# Allegro board EmonTx02_V21.brd
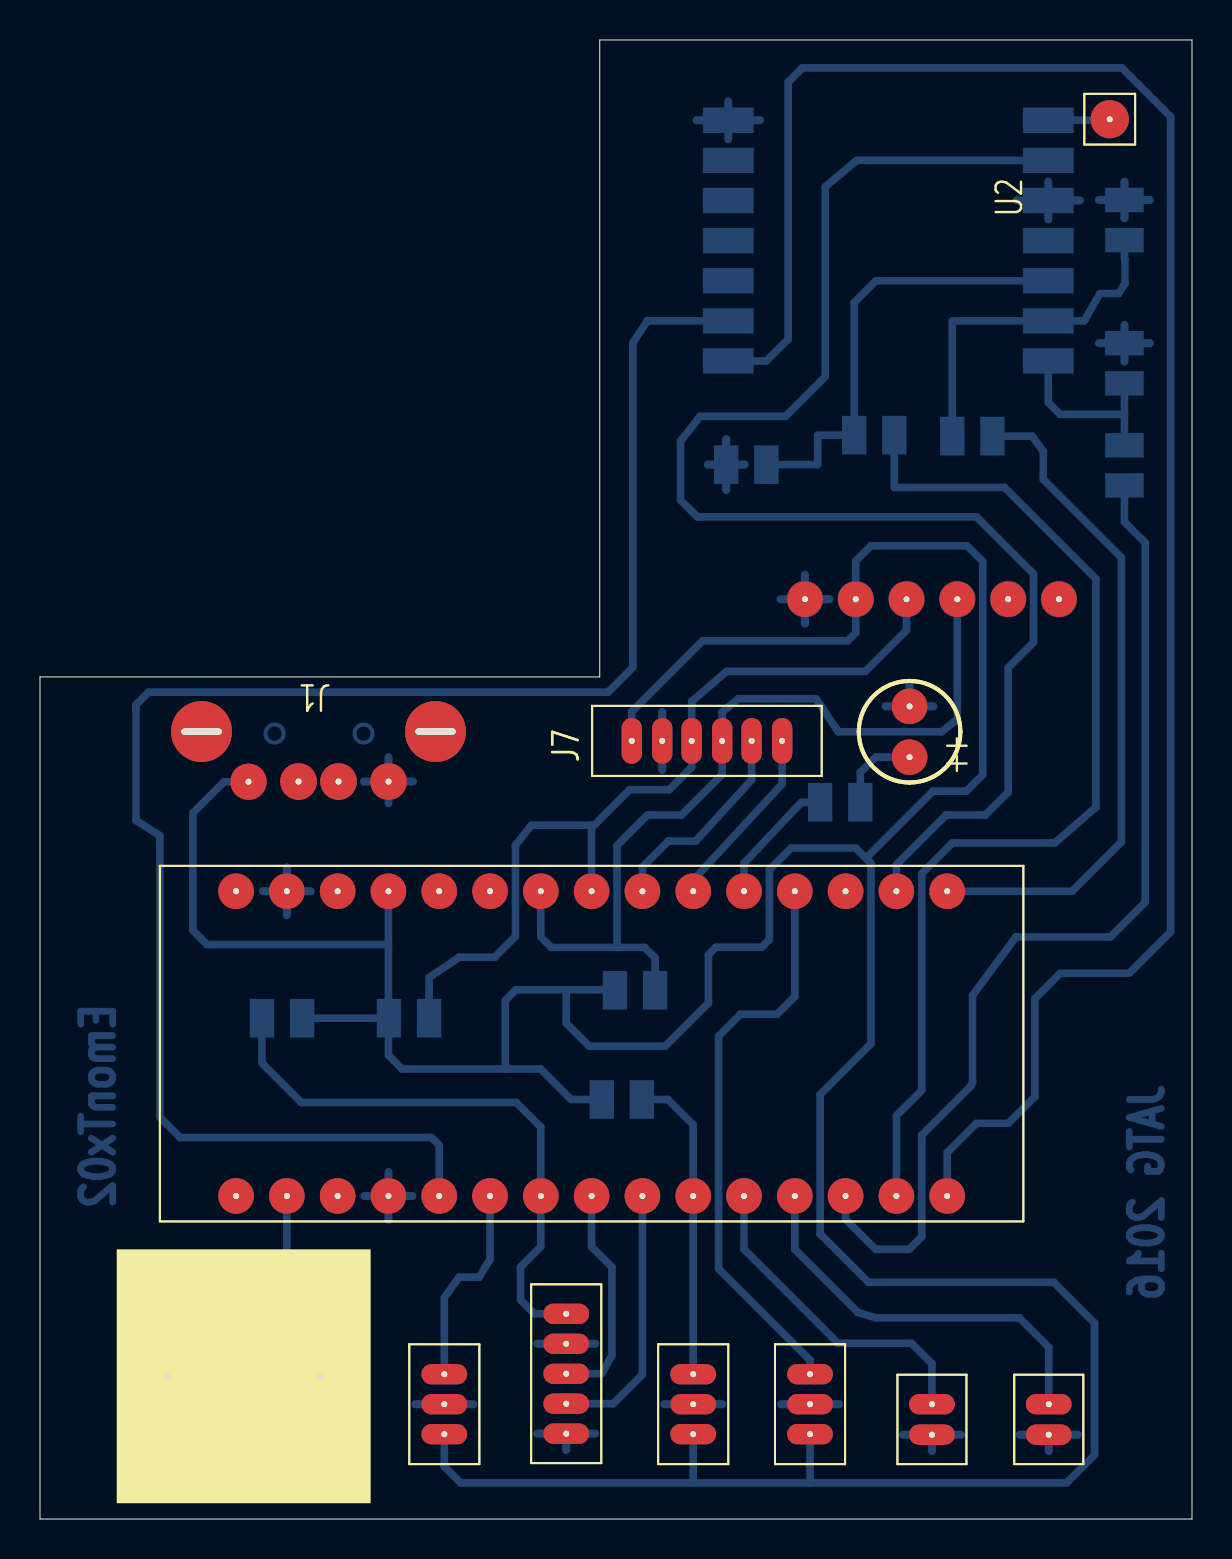
[diagram p0: board, top side]
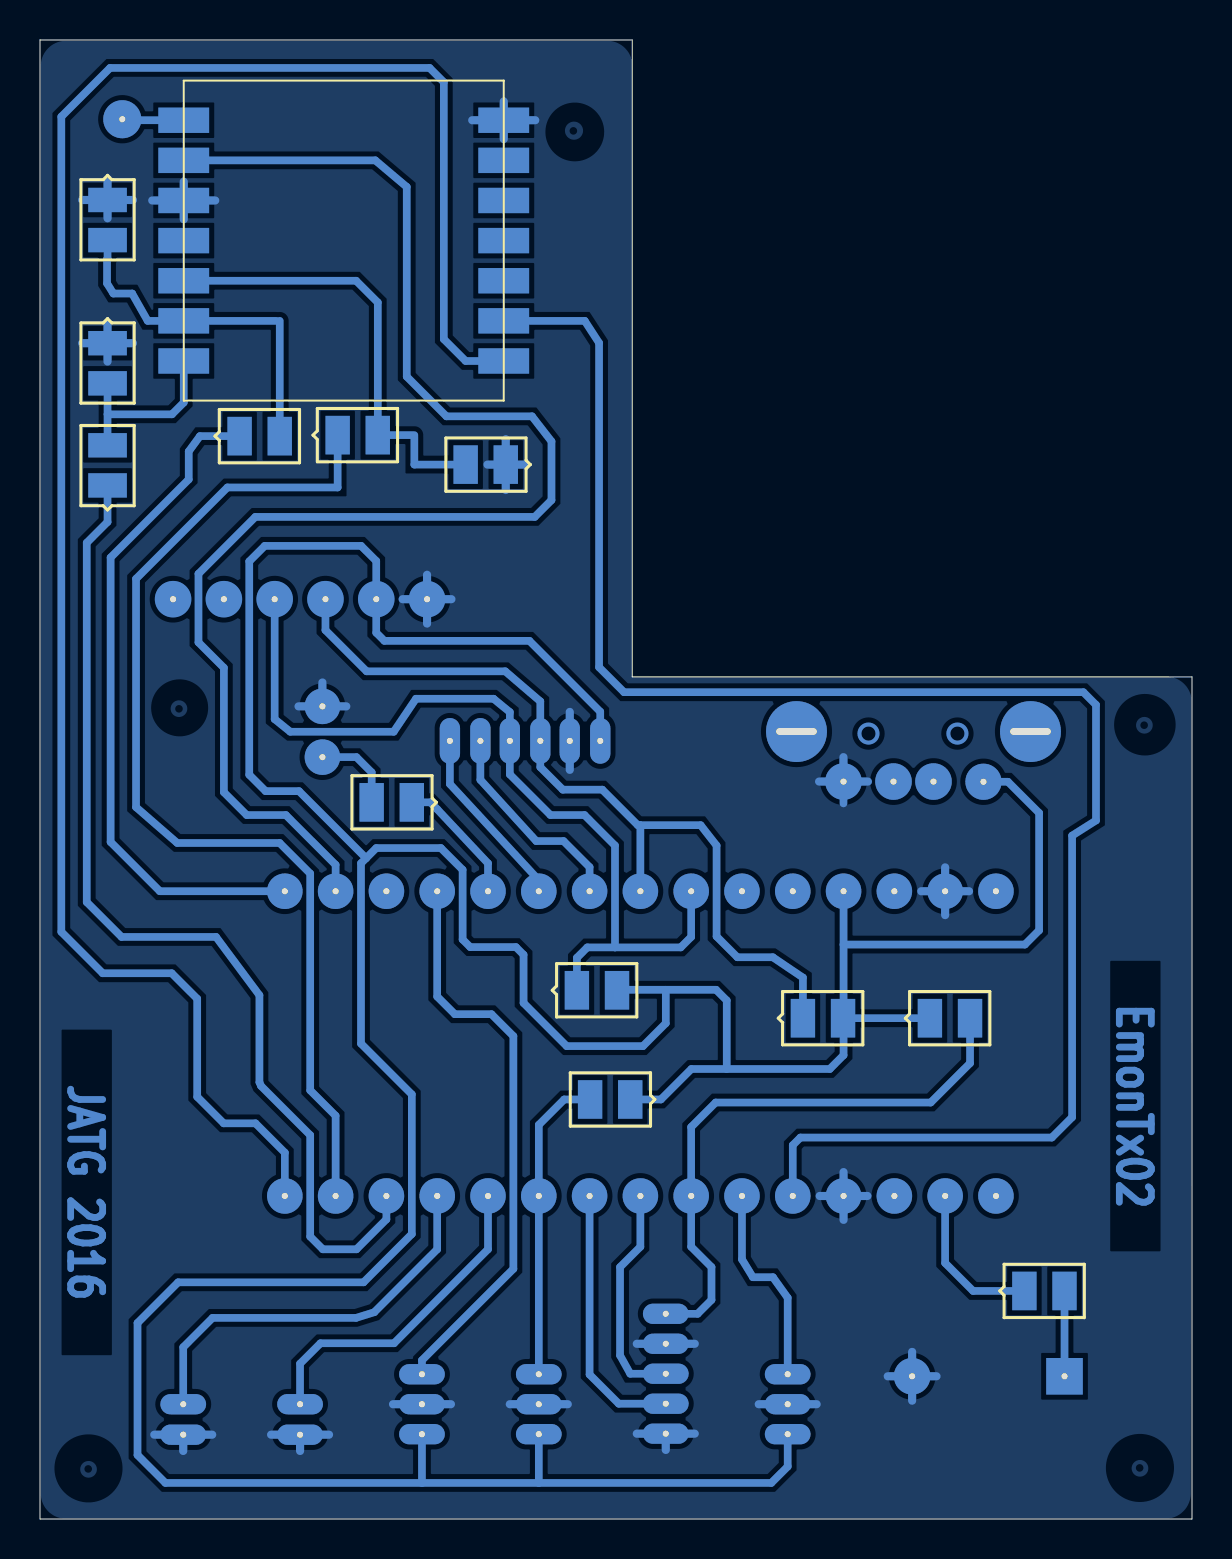
[diagram p1: board, bottom side, seen from below]

Outline 57.61 x 73.96 mm; copper layers: TOP, BOTTOM. Coordinates in mm from the lower left corner of the outline.
Outline path: 0,42.11 27.99,42.11 27.99,73.96 57.61,73.96 57.61,0 0,0 0,42.11

## Placement (name value [footprint] x y rotation side)
D1  LO_L296-TYP  [CPCYL1D200LS100031]  43.48 38.1 90 top
J1  USB  [USB_A]  22.43 43.13 180 top
J2  SELECT  [JST_ZH_2]  50.44 4.98 0 top
J3  TERMA  [JST_ZH_5]  26.31 7.26 0 top
J4  FLW_METER  [JST_ZH_3]  20.22 5.74 0 top
J5  SW1  [JST_ZH_2]  44.6 4.98 0 top
J6  DHT22  [JST_ZH_3]  32.66 5.74 0 top
J7  DISPLAY  [JST_ZH_6]  33.35 38.91 90 top
J8  PRES_METER  [JST_ZH_3]  38.51 5.74 0 top
K1  Buzzer  [BUZZER]  10.19 7.14 0 top
NOREF  -  [unnamed]  53.49 70 0 top
R1  4.7k  [SMD080512]  54.23 51.69 90 bottom
R2  10k  [SMD080512]  54.23 58.8 270 bottom
R3  4.7k  [SMD080512]  42.72 54.2 180 bottom
R4  10k  [SMD080512]  34.32 52.73 0 bottom
R5  4.7k  [SMD080512]  47.62 54.15 180 bottom
R6  10k  [SMD080512]  54.23 65.96 270 bottom
R7  4.7k  [SMD080512]  13.11 25.04 180 bottom
R8  4.7k  [SMD080512]  28.09 20.98 0 bottom
R9  100  [SMD080512]  39.01 35.84 0 bottom
R10  100  [SMD080512]  8.38 11.4 180 bottom
R11  4.7k  [SMD080512]  30.76 26.44 180 bottom
R12  4.7k  [SMD080512]  19.46 25.04 180 bottom
U1  Arduino Nano  [ARDUINO_NANO]  27.58 23.77 90 top
U2  -  [DS1307]  40.79 70.26 270 top
U3  RFM69CW  [RFM69]  42.42 63.93 180 bottom

## Library data of the parts
D1 = LO_L296-TYP_0
J1 = 4 HEADER_2
J2 J5 = CONN TRBLK 2
J3 = CONN TRBLK 4_0
J4 J6 J8 = CONN TRBLK 3
J7 = CONN TRBLK 6
K1 = Buzzer_0
R1-R12 = R_0
U1 = Arduino Nano_12
U2 = DS1307_0
U3 = RFN69CW_4

## Footprints (pads in the part's own frame, mm; a bottom-side part is the same pattern mirrored in y, then rotated)
ARDUINO_NANO
  round 1.778 hole 0.305: 1(-7.62,17.78) 2(-7.62,15.24) 3(-7.62,12.7) 4(-7.62,10.16) 5(-7.62,7.62) 6(-7.62,5.08) 7(-7.62,2.54) 8(-7.62,0) 9(-7.62,-2.54) 10(-7.62,-5.08) 11(-7.62,-7.62) 12(-7.62,-10.16) 13(-7.62,-12.7) 14(-7.62,-15.24) 15(-7.62,-17.78) 16(7.62,-17.78) 17(7.62,-15.24) 18(7.62,-12.7) 19(7.62,-10.16) 20(7.62,-7.62) 21(7.62,-5.08) 22(7.62,-2.54) 23(7.62,0) 24(7.62,2.54) 25(7.62,5.08) 26(7.62,7.62) 27(7.62,10.16) 28(7.62,12.7) 29(7.62,15.24) 30(7.62,17.78)
BUZZER
  rect 1.829x1.829 hole 0.305: 1(-3.81,0)
  round 1.829 hole 0.305: 2(3.81,0)
CPCYL1D200LS100031
  round 1.778 hole 0.305: 1(0,0) 2(2.54,0)
DS1307
  round 1.778 hole 0.305: 1(24.257,10.16) 2(24.257,7.62) 3(24.257,5.08) 4(24.257,2.54) 5(24.257,0) 6(24.257,-2.54)
JST_ZH_2
  oval 2.286x1.016 hole 0.305: 1(0,0.762) 2(0,-0.762)
JST_ZH_3
  oval 2.286x1.016 hole 0.305: 1(0,1.499) 2(0,0) 3(0,-1.499)
JST_ZH_5
  oval 2.286x1.016 hole 0.305: 1(0,2.997) 2(0,1.499) 3(0,0) 4(0,-1.499) 5(0,-2.997)
JST_ZH_6
  oval 2.286x1.016 hole 0.305: 1(0,3.759) 2(0,2.235) 3(0,0.762) 4(0,-0.762) 5(0,-2.235) 6(0,-3.759)
RFM69
  rect 2.54x1.27 smd: 1(-8.001,6.02) 2(-8.001,4.013) 3(-8.001,2.007) 4(-8.001,0) 5(-8.001,-2.007) 6(-8.001,-4.013) 7(-8.001,-6.02) 8(8.001,-6.02) 9(8.001,-4.013) 10(8.001,-2.007) 11(8.001,0) 12(8.001,2.007) 13(8.001,4.013) 14(8.001,6.02)
SMD080512
  rect 1.219x1.93 smd: 1(0,0) 2(2.007,0)
unnamed
  round 1.905 hole 0.305: 1(0,0)
USB_A
  round 1.81 hole 0.305: 1(12,6.26)
  round 1.83 hole 0.305: 2(9.5,6.25) 3(7.5,6.25) 4(5,6.25)
  round 3.046 hole 2.032x0.33: S1(2.65,3.75) S2(14.35,3.75)

## Nets
+5V: J1.1 J4.3 J6.3 J7.1 J8.3 R7.1 R8.1 R11.2 R12.2 U1.27(+5V) U2.5(VCC)
GND_POWER: D1.2 J1.4 J2.2 J3.2 J3.5 J4.2 J5.2 J6.2 J7.2 J8.2 K1.2(-) R2.1 R4.1 R6.1 U1.4(GND#4) U1.29(GND#29) U2.6(GND) U3.3(GND1) U3.14(GND2)
N01277: J7.4 R11.1 U1.24(A5/SCL) U2.3(SCL)
N01949: U1.17(3V3) U3.2(3.3V)
N02206: U1.15(D12) U3.8(MISO)
N02980: R1.1 U1.13(D10)
N02984: R3.1 U1.14(D11)
N03496: U1.5(D2) U3.9(IRQ)
N04662: R5.1 U1.16(D13)
N04697: R1.2 R2.2 U3.7(NSS)
N04701: R3.2 R4.2 U3.5(MOSI)
N04705: R5.2 R6.2 U3.6(SCK)
N06345: J4.1 U1.6(D3)
N06360: J3.1 R7.2 U1.7(D4)
N06378: J3.3 U1.8(D5)
N06390: J6.1 R8.2 U1.10(D7)
N06975: J7.3 R12.1 U1.23(A4/SDA) U2.4(SDA)
N07470: J7.5 U1.22(A3)
N07485: J5.1 U1.11(D8)
N08281: J2.1 U1.12(D9)
N12923: K1.1(+) R10.2
N17142: J3.4 U1.9(D6)
N28243: R10.1 U1.2(D0/RX)
N30373: J8.1 U1.19(A0)
N30848: R9.1 U1.20(A1)
N30872: J7.6 U1.21(A2)
N32226: D1.1 R9.2

Pads without a net: J1 2 3 S1 S2; NOREF 1; U1 1 3 18 25 26 28 30; U2 1 2; U3 1 4 10 11 12 13

## Routing (per net, layer and track width the routed paths; a pad name or vN(x,y) marks a point on that pad's centre or on a via; arc(x,y) is an arc through that point)
+5V: length 202.7
  BOTTOM w0.127: 17.45,25.29 17.42,25.29 17.42,25.04 R12.2
  BOTTOM w0.381: 38.51,1.8 51.33,1.8 52.73,3.2 52.73,9.8 50.7,11.84 41.43,11.84 39.01,14.25 39.01,21.23 41.55,23.77 41.55,32.79 41.3,33.05 ; 38.51,1.8 J8.3 ; 38.51,1.8 32.66,1.8 ; J4.3 20.22,2.62 21.04,1.8 32.66,1.8 ; 23.27,22.5 18.11,22.5 17.42,23.19 17.42,25.04 R7.1 ; 23.27,22.5 25.03,22.5 26.56,20.98 R8.1 ; 23.27,22.5 23.27,25.93 23.8,26.47 26.31,26.47 ; U1.27 17.42,28.73 ; 17.42,28.73 17.42,25.29 ; 17.42,28.73 8.36,28.73 7.65,29.44 7.65,35.31 9.21,36.87 J1.1 ; 41.3,33.05 40.79,33.55 37.56,33.55 36.47,32.47 36.47,28.98 36.09,28.6 33.81,28.6 33.43,28.22 33.43,25.81 31.27,23.65 27.46,23.65 26.31,24.79 26.31,26.47 ; 41.3,33.05 44.65,36.4 46.32,36.4 47.14,37.22 47.14,47.89 46.37,48.67 41.55,48.67 40.79,47.91 U2.5 40.79,44.32 40.39,43.92 33.13,43.92 29.59,40.37 J7.1 ; 26.31,26.47 28.75,26.47 R11.2 ; J6.3 32.66,1.8
GND_POWER: length 76.4
  BOTTOM w0.127: 17.42,35.78 17.43,35.78
  BOTTOM w0.381: 17.43,35.78 J1.4
  BOTTOM w0.406: U2.6 38.25,47.22 ; U2.6 39.47,46 ; U2.6 38.25,44.78 ; U2.6 37.03,46 ; 54.23,65.05 R6.1 ; R6.1 55.5,65.96 ; R6.1 52.96,65.96 ; R6.1 54.23,66.88 ; 12.34,30.2 U1.29 ; U1.29 11.15,31.39 ; U1.29 12.34,32.59 ; U1.29 13.54,31.39 ; 31.12,37.46 J7.2 31.12,40.36 ; 18.77,5.74 J4.2 21.67,5.74 ; J2.2 51.89,4.22 ; J2.2 50.44,3.4 ; J2.2 49,4.22 ; K1.2 14,8.36 ; K1.2 14,5.92 ; K1.2 12.78,7.14 ; K1.2 15.22,7.14 ; U1.4 17.42,17.35 ; U1.4 17.42,14.96 ; U1.4 16.23,16.15 ; U1.4 18.62,16.15 ; D1.2 44.68,40.64 ; D1.2 43.48,41.83 ; D1.2 42.29,40.64 ; 52.96,58.8 R2.1 ; R2.1 54.23,59.72 ; R2.1 55.5,58.8 ; R2.1 54.23,57.89 ; 24.87,8.76 J3.2 27.76,8.76 ; 24.87,4.27 J3.5 ; J3.5 26.31,3.45 ; J3.5 27.76,4.27 ; J1.4 18.65,36.88 ; J1.4 17.43,38.1 ; J1.4 16.21,36.88 ; 37.06,5.74 J8.2 39.95,5.74 ; J5.2 46.05,4.22 ; J5.2 44.6,3.4 ; J5.2 43.15,4.22 ; 48.84,65.94 U3.3 ; U3.3 50.42,65 ; U3.3 50.42,66.88 ; U3.3 51.99,65.94 ; R4.1 35.23,52.73 ; R4.1 34.32,54 ; R4.1 33.4,52.73 ; R4.1 34.32,51.46 ; U3.14 34.42,70.89 ; U3.14 34.42,69.01 ; U3.14 35.99,69.95 ; U3.14 32.84,69.95 ; 34.11,5.74 J6.2 31.22,5.74
Net_11: length 2.2
  BOTTOM w0.381: 53.21,69.95 51,69.95
N01277: length 44.1
  BOTTOM w0.381: R11.1 30.76,28.06 30.24,28.58 28.85,28.58 ; U2.3 45.87,40 45.09,39.37 39.92,39.37 38.81,41.02 34.93,41.02 34.11,40.35 J7.4 34.11,37.24 32.08,35.2 30.38,35.2 28.85,33.68 28.85,28.58 ; 28.85,28.58 25.57,28.58 25.04,29.11 U1.24
N01949: length 71.8
  BOTTOM w0.381: U1.17 42.82,32.72 45.31,35.2 47.27,35.2 48.41,36.35 48.41,42.57 49.68,43.84 49.68,47.27 46.84,50.11 32.87,50.11 32.03,50.95 32.03,53.89 33,55.14 37.28,55.14 39.27,57.13 39.27,66.62 40.84,67.94 U3.2
N02206: length 98.3
  BOTTOM w0.381: U1.15 45.36,18.32 46.83,19.79 48.42,19.79 49.74,21.11 49.74,26.02 51.02,27.29 54.47,27.29 56.54,29.36 56.54,70.13 54.1,72.57 38.13,72.57 37.41,71.86 37.41,59 36.32,57.91 U3.8
N02980: length 51.1
  BOTTOM w0.381: R1.1 54.23,49.86 55.27,48.82 55.27,30.85 53.53,29.11 48.8,29.11 46.63,26.19 46.63,21.84 46.56,21.66 44.09,19.2 44.09,14.12 43.46,13.49 41.78,13.49 40.28,14.99 U1.13
N02984: length 52.7
  BOTTOM w0.381: U1.14 42.82,20.17 44.09,21.44 44.09,32.28 45.62,33.81 50.74,33.81 52.8,35.6 52.8,47.02 48.23,51.59 42.72,51.59 R3.1
N03496: length 85.6
  BOTTOM w0.381: U1.5 19.96,18.69 19.58,19.08 7.01,19.08 5.99,20.09 5.99,34.17 4.8,34.93 4.8,40.72 5.43,41.35 28.4,41.35 29.65,42.6 29.65,58.81 30.37,59.92 U3.9
N04662: length 33.8
  BOTTOM w0.381: U1.16 51.61,31.39 54.08,33.86 54.08,48.08 50.17,51.99 50.17,53.39 49.61,54.15 R5.1
N04697: length 9.3
  BOTTOM w0.127: 50.44,57.94 U3.7
  BOTTOM w0.381: R2.2 54.23,55.25 ; 54.23,55.25 R1.2 ; 54.23,55.25 51.01,55.25 50.42,55.83 U3.7
N04701: length 22.7
  BOTTOM w0.127: 38.89,54.2 38.89,54.13
  BOTTOM w0.381: 38.89,54.2 R3.2 40.72,60.84 41.8,61.93 U3.5 ; 38.89,54.13 38.89,52.73 R4.2
N04705: length 17.7
  BOTTOM w0.127: 45.62,59.92 45.8,59.92
  BOTTOM w0.381: R6.2 54.23,63.03 54.25,63 54.25,61.79 53.94,61.28 53,61.28 52.22,59.92 U3.6 45.8,59.92 ; R5.2 45.62,59.92
N06345: length 10.3
  BOTTOM w0.381: J4.1 20.22,11.06 20.96,12.09 21.96,12.09 22.5,12.99 U1.6
N06360: length 29.2
  BOTTOM w0.381: J3.1 24.72,10.26 24.03,10.96 24.03,12.6 25.04,13.61 U1.7 25.04,19.6 23.82,20.83 13.07,20.83 11.1,22.79 R7.2
N06378: length 11.2
  BOTTOM w0.381: U1.8 27.58,13.61 28.6,12.6 28.6,8.18 28.09,7.26 J3.3
N06390: length 15.6
  BOTTOM w0.381: R8.2 31.39,20.98 32.66,19.71 U1.10 J6.1
N06975: length 42.4
  BOTTOM w0.381: U2.4 43.33,44.45 41.28,42.39 34.34,42.39 32.59,40.89 J7.3 32.59,37.6 31.46,36.47 29.49,36.47 27.71,34.7 27.58,34.7 ; 27.58,34.7 24.57,34.7 23.77,33.68 23.77,29.13 22.73,28.09 20.96,28.09 19.46,27.08 R12.1 ; 27.58,34.7 U1.23
N07470: length 10.5
  BOTTOM w0.381: J7.5 35.59,36.97 32.79,33.9 31.43,33.9 30.12,32.6 U1.22
N07485: length 16.5
  BOTTOM w0.381: U1.11 35.2,13.49 39.9,8.79 43.58,8.79 44.6,7.77 J5.1
N08281: length 20.4
  BOTTOM w0.381: 50.44,5.49 J2.1 50.44,8.59 48.98,10.06 41.8,10.06 40.89,10.34 37.74,13.49 U1.12
N12923: length 4.3
  BOTTOM w0.381: 6.38,7.14 6.38,11.4
N17142: length 13.3
  BOTTOM w0.381: U1.9 30.12,7.22 28.67,5.77 J3.4
N28243: length 7.9
  BOTTOM w0.381: R10.1 10.95,11.4 12.34,12.8 U1.2
N30373: length 28.7
  BOTTOM w0.381: U1.19 37.74,26.13 36.86,25.24 35.03,25.24 33.93,24.15 33.93,12.51 38.51,7.94 J8.1
N30848: length 6.5
  BOTTOM w0.381: U1.20 35.2,32.79 37.74,35.5 38.09,35.84 R9.1
N30872: length 9.3
  BOTTOM w0.381: U1.21 32.66,31.95 37.11,36.76 J7.6
N32226: length 4.3
  BOTTOM w0.381: R9.2 41.02,37.34 41.78,38.1 D1.1

## Copper pours and planes (outline as drawn; the poured copper is in the pictures)
Net_10 on BOTTOM: 30.45,69.43 31.36,69.43 ; 1 cut-out
Net_10 on BOTTOM: 2.19,2.54 3.02,2.54 ; 1 cut-out
Net_10 on BOTTOM: 1.96,39.69 2.8,39.69 ; 1 cut-out
Net_10 on BOTTOM: 54.76,2.48 55.6,2.48 ; 1 cut-out
Net_10 on BOTTOM: 50.24,40.52 51.07,40.52 ; 1 cut-out
GND_POWER on BOTTOM: 57.57,1.28 57.2,0.38 56.3,0.01 1.33,0.01 0.43,0.38 0.06,1.28 0.01,40.86 0.38,41.75 1.28,42.13 27.98,42.16 27.98,72.66 28.35,73.55 29.25,73.93 56.3,73.93 57.2,73.55 57.57,72.66 ; 5 cut-outs

Small or netless copper shapes (teardrops, artwork), in the pictures only: 5 on BOTTOM

## Text on the board
BOTTOM: EmonTx02 | JATG 2016
Ref Des/Assembly Top: FLW_METER | TERMA_STATUS | DTH22 | PRES_METER | SW_ON_TERMA | SW_SELECT | ANT
